# Altium PCB dual-motor-driver.PcbDoc
Units mil, origin at the board's own origin, x right, y up, seen from the top; angles counter-clockwise.
Board outline 2940 x 1790 mil, 2 copper layers (Component Side, Bottom Layer), stack 12.8 mil thick; 58 components, 38 nets, 164 pads, 475 vias.
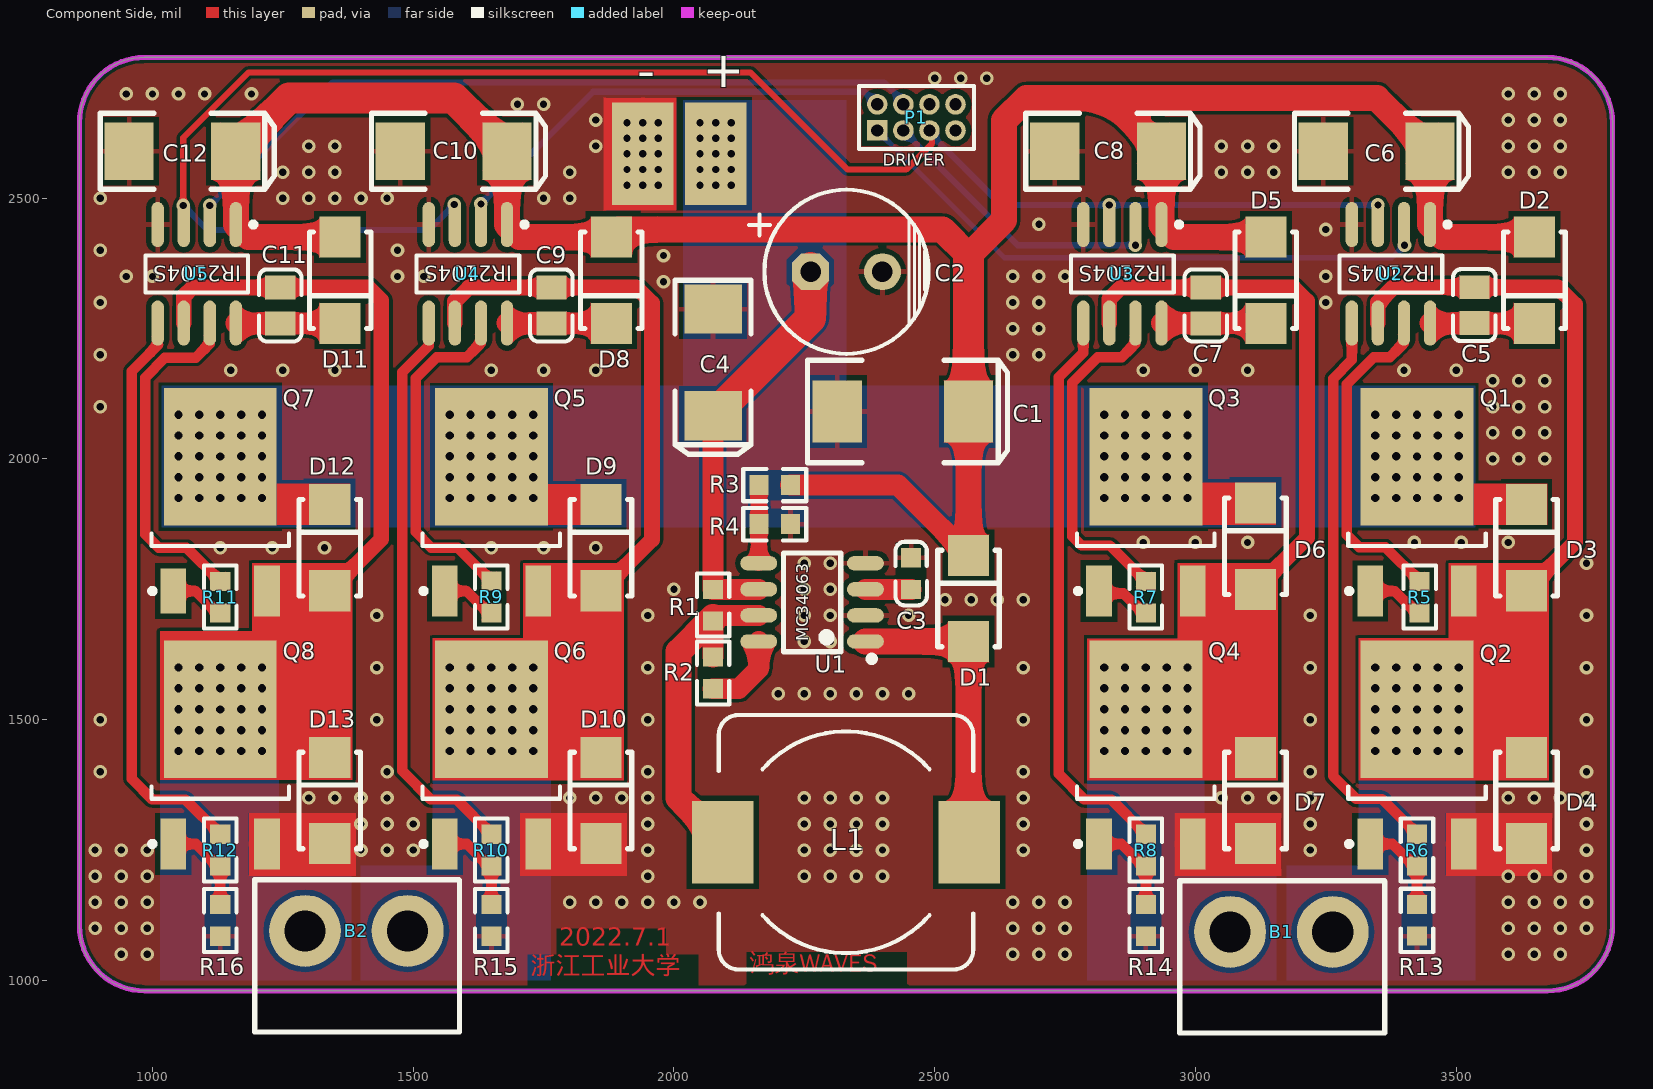
[diagram p0: Component Side view]
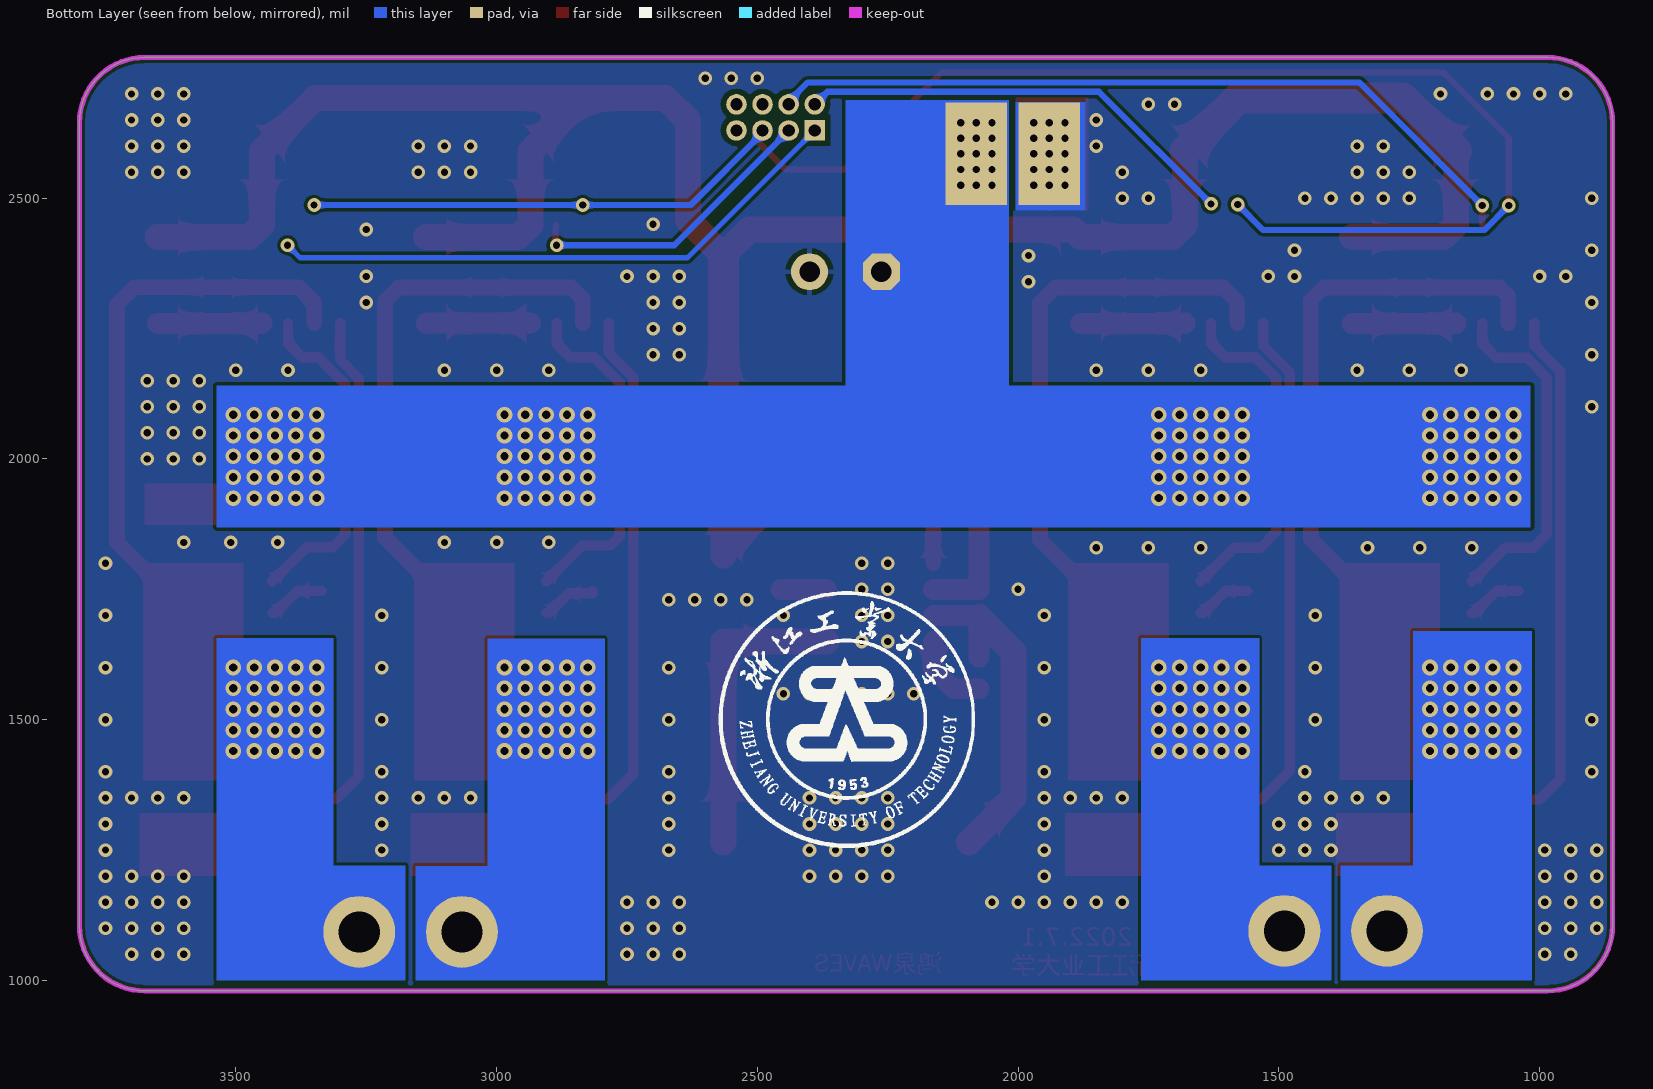
[diagram p1: Bottom Layer view, seen from below]
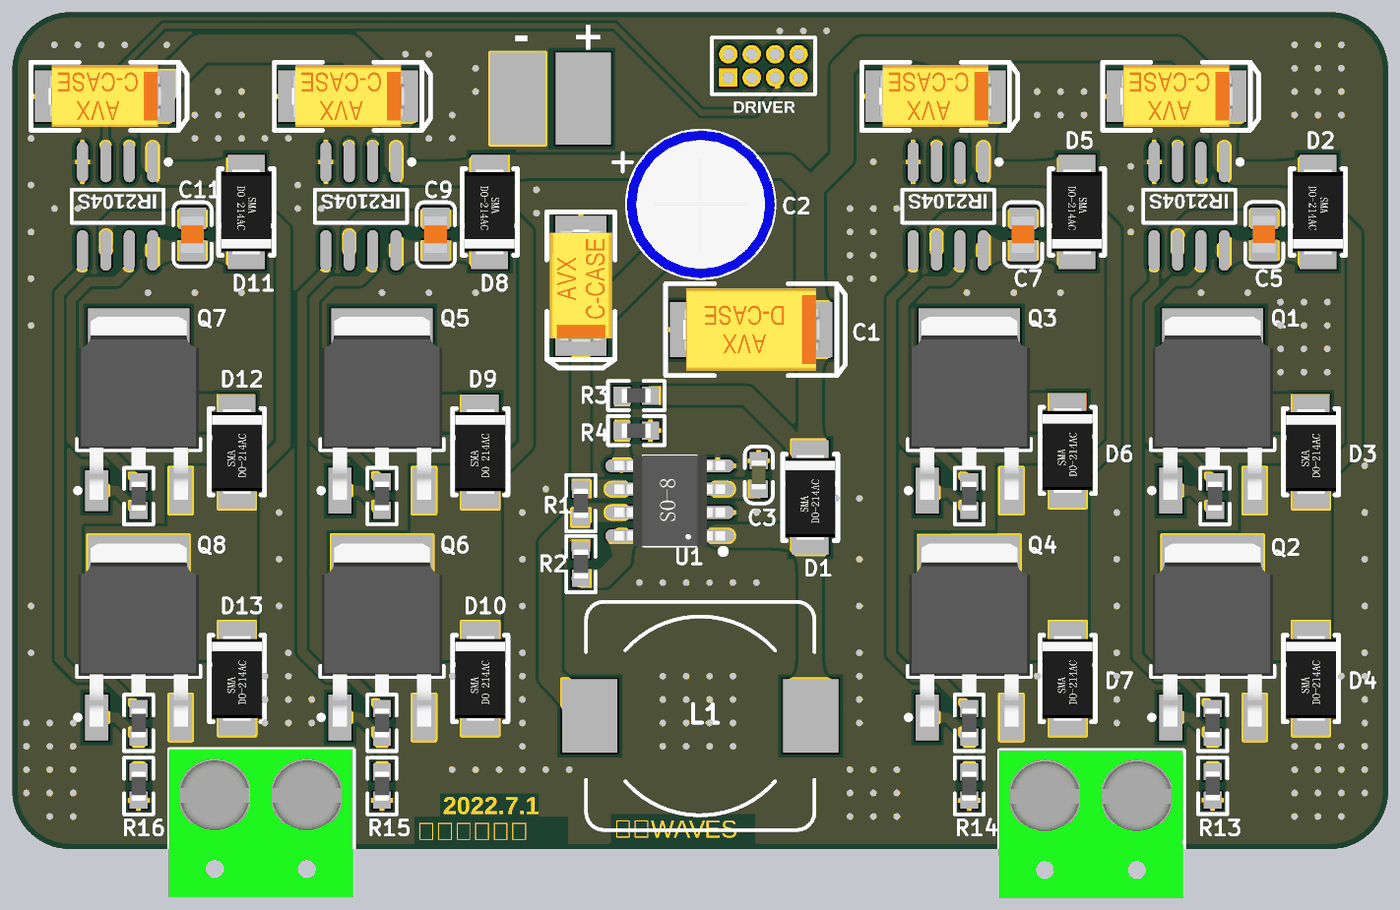
[diagram p2: 3D render of the assembled board from above, using the file's embedded part models]

## Layer stack, top to bottom
Top Solder: solder mask 0.4, Solder Resist, Dk 3.5
Component Side: signal copper 1.4
Dielectric 1: core 10, FR-4, Dk 4.2
Bottom Layer: signal copper 1.4
Solder Side: solder mask 0.4, Solder Resist, Dk 3.5

## Board outline
860,1105 860,2645 cw(c985,2645) 985,2770 3675,2770 cw(c3675,2645) 3800,2645 3800,1105 cw(c3675,1105) 3675,980 985,980 cw(c985,1105)

## Design rules (kind name [scope] priority, off if disabled: settings)
Clearance [All] p1: gap=6 ignorepadtopadclearanceinfootprint=FALSE except(0: Arc-Hole Track-Hole SMDPad-Hole THPad-Hole Via-Hole Fill-Hole Poly-Hole Region-Hole Text-Hole; 10: Arc-SMDPad Arc-THPad Arc-Fill Track-SMDPad Track-THPad Track-Fill SMDPad-SMDPad SMDPad-THPad SMDPad-Via SMDPad-Fill SMDPad-Poly SMDPad-Region SMDPad-Text THPad-THPad THPad-Via THPad-Fill THPad-Poly THPad-Region THPad-Text Via-Fill Fill-Fill)
HoleSize [All] p1: absolutevalues=TRUE maxlimit=240 minlimit=1 maxpercent=80.000 minpercent=20.000
MinimumSolderMaskSliver [All] p1: minsoldermaskwidth=0
PolygonConnect PolygonConnect_GND [ISVIA] p1: connectstyle=Direct reliefconductorwidth=10 reliefentries=4 polygonreliefangle="90 Angle" airgapwidth=10
PolygonConnect [All] p2: connectstyle=Relief reliefconductorwidth=10 reliefentries=4 polygonreliefangle="90 Angle" airgapwidth=10
RoutingVias [All] p1: holewidth=18 width=30 viastyle="Through Hole" minholewidth=12 minwidth=22 maxholewidth=24 maxwidth=40
SilkToSilkClearance [All] p1: silktosilkclearance=0
SilkToSolderMaskClearance [IsPad] p1: minsilkscreentomaskgap=0 clearancetoexposedcopper=TRUE
SolderMaskExpansion [All] p1: expansion=4
UnpouredPolygon [All] p1: allowunpoured=TRUE allowshelved=TRUE
Width [All] p1: maxlimit=500 minlimit=6 preferedwidth=10
25 further rules are at their usual default settings.

## Components (designator, comment, footprint, x,y, rotation, side; value= is the part's Value field where it differs from the comment)
B1 "Motor" "Con 2接线端子" 3165,1093 r180 top
B2 "Motor" "Con 2接线端子" 1391,1095 r180 top
C1 "Cap-Pol" LC-CASE-D_7343 2439,2091 r0 top
C2 "Cap-Pol-ES" C-RB-3.5/8 2331,2359 r0 top
C3 "Cap" LC-0603_C 2455,1780.32 r270 top
C4 "Cap-Pol" LC-CASE-C_6032 2075,2185 r270 top
C5 "Cap" LC-0805_C 3535,2295 r90 top
C6 "Cap-Pol" LC-CASE-C_6032 3347.64,2590 r0 top
C7 "Cap" LC-0805_C 3020,2294.45 r90 top
C8 "Cap-Pol" LC-CASE-C_6032 2832.64,2590 r0 top
C9 "Cap" LC-0805_C 1765,2294.45 r90 top
C10 "Cap-Pol" LC-CASE-C_6032 1577.64,2590 r0 top
C11 "Cap" LC-0805_C 1245,2294.45 r90 top
C12 "Cap-Pol" LC-CASE-C_6032 1057.64,2590 r0 top
D1 "1N5819" LC-SMA(DO-214AC)_S1 2565,1732.32 r270 top
D2 "1N5819" LC-SMA(DO-214AC)_S1 3650,2342.68 r90 top
D3 "1N5819" LC-SMA(DO-214AC)_S1 3635,1830 r270 top
D4 "1N5819" LC-SMA(DO-214AC)_S1 3635,1345 r270 top
D5 "1N5819" LC-SMA(DO-214AC)_S1 3135,2342.68 r90 top
D6 "1N5819" LC-SMA(DO-214AC)_S1 3115,1832.68 r270 top
D7 "1N5819" LC-SMA(DO-214AC)_S1 3115,1345 r270 top
D8 "1N5819" LC-SMA(DO-214AC)_S1 1880,2342.68 r90 top
D9 "1N5819" LC-SMA(DO-214AC)_S1 1860,1830 r270 top
D10 "1N5819" LC-SMA(DO-214AC)_S1 1860,1345 r270 top
D11 "1N5819" LC-SMA(DO-214AC)_S1 1360,2342.68 r90 top
D12 "1N5819" LC-SMA(DO-214AC)_S1 1340,1830 r270 top
D13 "1N5819" LC-SMA(DO-214AC)_S1 1340,1345 r270 top
L1 "Inductor Iron" L-SMD-12 2330,1265 r0 top
P1 "DRIVER" MHDR2X4 2390,2630 r0 top
Q1 "IRLR7843" TO-252AA_M#1 3425,1920 r90 top
Q2 "IRLR7843" TO-252AA_M#1 3425,1435 r90 top
Q3 "IRLR7843" TO-252AA_M#1 2905,1920 r90 top
Q4 "IRLR7843" TO-252AA_M#1 2905,1435 r90 top
Q5 "IRLR7843" TO-252AA_M#1 1650,1920 r90 top
Q6 "IRLR7843" TO-252AA_M#1 1650,1435 r90 top
Q7 "IRLR7843" TO-252AA_M#2 1130,1920 r90 top
Q8 "IRLR7843" TO-252AA_M#1 1130,1435 r90 top
R1 "Res1" LC-0603_R 2075,1719.68 r90 top
R2 "Res1" LC-0603_R 2075,1589.68 r90 top
R3 "Res1" LC-0603_R 2193.32,1950 r180 top
R4 "Res1" LC-0603_R 2193.32,1875 r180 top
R5 "Res1" LC-0603_R 3430,1735 r90 top
R6 "Res1" LC-0603_R 3425,1250 r90 top
R7 "Res1" LC-0603_R 2905,1735 r90 top
R8 "Res1" LC-0603_R 2905,1250 r90 top
R9 "Res1" LC-0603_R 1650,1735.31 r90 top
R10 "Res1" LC-0603_R 1650,1250 r90 top
R11 "Res1" LC-0603_R 1130,1735 r90 top
R12 "Res1" LC-0603_R 1130,1250 r90 top
R13 "Res1" LC-0603_R 3425,1115.32 r270 top
R14 "Res1" LC-0603_R 2905,1115 r270 top
R15 "Res1" LC-0603_R 1650,1115 r270 top
R16 "Res1" LC-0603_R 1130,1115 r270 top
U1 "MC34063" LC-SOIC-8_150mil 2265,1725 r90 top
U2 "IR2104S" SO-8_N 3375,2355 r270 top
U3 "IR2104S" SO-8_N 2860,2355 r270 top
U4 "IR2104S" SO-8_N 1605,2355 r270 top
U5 "IR2104S" SO-8_N 1085,2355 r270 top

## Footprints (in the part's own frame and the unit in brackets; to place one, negate y for a bottom-side part, rotate by r counter-clockwise, add the part's x,y. Pads: shape width x height; smd on the part's side, far side on the other; paste and mask are expansions set on the pad)
C-RB-3.5/8 [mm] "插件电解电容"
  oct 1.8x1.8 hole 1: 1(-1.75,0)
  round 1.8 hole 1: 2(1.75,0)
  silkscreen extent -4.74,-4 4,4, body extent -4.03,-4.03 4.03,4.03, height 12.03
"Con 2接线端子" [mm]
  round 3.5 hole 2: 1(-2.5,0) 2(2.5,0)
  silkscreen extent -5.03,-2.49 4.95,4.93, body extent -5,-2.5 5,5.5, height 1.5
L-SMD-12 [mm] "贴片电感12*12"
  rect 3x4 smd: 1(-6,0) 2(6,0)
  silkscreen extent -6.2,-6.2 6.2,6.2, body extent -6.2,-6.22 6.2,6.17, height 2.5
LC-0603_C [mm]
  rect 0.93x0.98 smd: 1(-0.77,0) 2(0.77,0)
  silkscreen extent -1.55,-0.76 1.55,0.76, body extent -0.8,-0.4 0.8,0.4, height 0.6
LC-0603_R [mm]
  rect 0.93x0.98 smd: 1(-0.77,0) 2(0.77,0)
  silkscreen extent -1.53,-0.79 1.54,0.79, body extent -0.8,-0.4 0.8,0.4, height 0.38
LC-0805_C [mm]
  rect 1.16x1.47 smd: 1(-0.875,0) 2(0.875,0)
  silkscreen extent -1.76,-1.04 1.76,1.04, body extent -1,-0.62 1,0.64, height 0.8
LC-CASE-C_6032 [mm]
  rect 2.4x2.8 smd: 1(2.6,0) 2(-2.6,0)
  silkscreen extent -4.01,-1.85 4.47,1.85, body extent -3.05,-1.68 3.05,1.67, height 2.7
LC-CASE-D_7343 [mm]
  rect 2.4x3 smd: 1(3.2,0) 2(-3.2,0)
  silkscreen extent -4.65,-2.5 5.1,2.5, body extent -3.7,-2.23 3.7,2.22, height 3.01
LC-SMA(DO-214AC)_S1 [mm]
  rect 2x2 smd: 1(2.1,0) 2(-2.1,0)
  silkscreen extent -2.35,-1.5 2.35,1.5, body extent -2.3,-1.35 2.3,1.35, height 2.4
LC-SOIC-8_150mil [mm]
  oval 0.7x1.8 smd: 1(-1.905,-2.6) 2(-0.635,-2.6) 3(0.635,-2.6) 4(1.905,-2.6) 5(1.905,2.6) 6(0.635,2.6) 7(-0.635,2.6) 8(-1.905,2.6)
  silkscreen extent -2.9,-3.05 2.4,1.4, body extent -2.45,-3 2.45,3, height 1.7
MHDR2X4 [mm] "Connector; Header; 4x2 Position"
  rect 1x1 hole 0.6: 1(0,0)
  round 1 hole 0.6: 2(0,1.27) 3(1.27,0) 4(1.27,1.27) 5(2.54,0) 6(2.54,1.27) 7(3.81,0) 8(3.81,1.27)
  silkscreen extent -0.9,-0.9 4.71,2.17
SO-8_N [mm] "SOIC, 8-Leads, Body 4.9x3.9mm, Pitch 1.27mm, IPC Medium Density"
  oval 2.2x0.6 smd: 1(-2.4,1.905) 2(-2.4,0.635) 3(-2.4,-0.635) 4(-2.4,-1.905) 5(2.4,-1.905) 6(2.4,-0.635) 7(2.4,0.635) 8(2.4,1.905)
  silkscreen extent -2.52,-2.5 0.9,2.88, body extent -1.95,-2.45 1.95,2.45, height 1.75
TO-252AA_M#1 [mm] "D-PAK, 4-Leads, Body 6.1x6.5mm, Pitch 2.28mm, Lead Span 9.8mm, IPC Low Density"
  rect 2.5x1.25 smd: 1(-4.4,2.28) 3(-4.4,-2.28)
  rect 6.7x5.5 smd: 4(2.15,0)
  silkscreen extent -4.52,-3.35 -1.6,3.43, body extent -4.9,-3.27 5.04,3.27, height 2.39
TO-252AA_M#2 [mm] "D-PAK, 4-Leads, Body 6.1x6.5mm, Pitch 2.28mm, Lead Span 9.8mm, IPC Low Density"
  rect 2.2x1.25 smd: 1(-4.4,2.28)
  rect 2.5x1.25 smd: 3(-4.4,-2.28)
  rect 6.7x5.5 smd: 4(2.15,0)
  silkscreen extent -4.52,-3.35 -1.6,3.43, body extent -4.9,-3.27 5.04,3.27, height 2.39

## Part data
B1 B2: library part "Motor Servo", "Servo Motor"
C1 C4 C6 C8 C10 C12: library part Cap-Pol-A, "钽电容"
C2: "贴片铝电解电容"
C3 C5 C7 C9 C11: "Capacitor"
D1 D2 D3 D4 D5 D6 D7 D8 D9 D10 D11 D12 D13: library part "D Schottky", "Schottky Diode"
L1: "Magnetic-Core Inductor"
P1: library part "Header 4X2", "电机驱动接口"
Q1 Q2 Q3 Q4 Q5 Q6 Q7 Q8: library part IRLR8503, "HEXFET Power MOSFET"
R1 R2 R3 R4 R5 R6 R7 R8 R9 R10 R11 R12 R13 R14 R15 R16: "Resistor"
U1: library part MC34063ADR, "Buck Inverting Buck-Boost Regulator with 3 to 40 V Input and 1.55 to 40 V Output, 0 to 70 degC, 8-Pin SOIC (D), Green (RoHS & no Sb/Br)"
U2 U3 U4 U5: "High and Low Side Driver"

## Free pads (board coordinates)
  rect 118.11x196.85 smd: 1(2080,2585) 2(1940,2585)
  rect 118.11x196.85 smd far side: 1(2080,2585) 2(1940,2585)

## Via types
v1: diameter 26, hole 14, Component Side to Bottom Layer, tented both sides, 275 vias
v2: diameter 30, hole 16, Component Side to Bottom Layer, tented both sides, 200 vias

## Nets (pads, with @x,y where several pads share a name; then routed paths per layer and width w, separated by ;. In a path a pad name is that pad's centre, name@x,y a point inside that pad or via, vN(x,y) a via of type N, cw(c..) or ccw(c..) an arc to the next point about the centre after c; other vN are vias at no path point)
GND: C1.2 C2.2 C3.1 C4.2 C6.2 C8.2 C10.2 C12.2 D4.1 D7.1 D10.1 D13.1 pad.2 Q2.3 Q4.3 Q6.3 Q8.3 R4.1 R13.2 R14.2 R15.2 R16.2 U1.2 U1.4 U2.4 U3.4 U4.4 U5.4
  other v1: 940,1050 990,1050 2650,1050 2700,1050 2750,1050 3600,1050 3650,1050 3700,1050 890,1100 940,1100 990,1100 2650,1100 2700,1100 2750,1100 3600,1100 3650,1100 3700,1100 3750,1100 890,1150 940,1150 990,1150 1800,1150 1850,1150 1900,1150 1950,1150 2000,1150 2050,1150 2650,1150 2700,1150 2750,1150 3600,1150 3650,1150 3700,1150 3750,1150 890,1200 940,1200 990,1200 1950,1200 2250,1200 2300,1200 2350,1200 2400,1200 3600,1200 3650,1200 3700,1200 3750,1200 890,1250 940,1250 990,1250 1400,1250 1450,1250 1500,1250 1950,1250 2250,1250 2300,1250 2350,1250 2400,1250 2670,1250 3220,1250 3750,1250 1400,1300 1450,1300 1500,1300 1950,1300 2250,1300 2300,1300 2350,1300 2400,1300 2670,1300 3220,1300 3750,1300 1300,1350 1350,1350 1400,1350 1450,1350 1800,1350 1850,1350 1900,1350 1950,1350 2250,1350 2300,1350 2350,1350 2400,1350 2670,1350 3050,1350 3100,1350 3150,1350 3220,1350 3600,1350 3650,1350 3700,1350 3750,1350 900,1400 1450,1400 1950,1400 2670,1400 3220,1400 3750,1400 900,1500 1430,1500 1950,1500 2670,1500 3220,1500 3750,1500 2200,1550 2250,1550 2300,1550 2350,1550 2400,1550 2450,1550 1430,1600 1950,1600 2670,1600 3220,1600 3750,1600 2250,1650 2300,1650 1430,1700 1950,1700 2250,1700 2300,1700 2450,1700 3220,1700 3750,1700 2520,1730 2570,1730 2620,1730 2670,1730 2000,1750 2250,1750 2300,1750 2250,1800 2300,1800 3750,1800 1130,1830 1230,1830 1330,1830 1650,1830 1750,1830 1850,1830 2900,1840 3000,1840 3100,1840 3420,1840 3510,1840 3600,1840 3570,2000 3620,2000 3670,2000 3570,2050 3620,2050 3670,2050 900,2100 3570,2100 3620,2100 3670,2100 3570,2150 3620,2150 3670,2150 1150,2170 1250,2170 1350,2170 1650,2170 1750,2170 1850,2170 2900,2170 3000,2170 3100,2170 3400,2170 3500,2170 900,2200 2650,2200 2700,2200 2650,2250 2700,2250 900,2300 2650,2300 2700,2300 3250,2300 1980,2340 950,2350 1000,2350 1470,2350 1520,2350 2650,2350 2700,2350 2750,2350 3250,2350 1980,2390 900,2400 1470,2400 3250,2440 2700,2450 900,2500 1250,2500 1300,2500 1350,2500 1400,2500 1450,2500 1750,2500 1800,2500 1910,2525 1940,2525 1970,2525 1250,2550 1300,2550 1350,2550 1800,2550 3050,2550 3100,2550 3150,2550 3600,2550 3650,2550 3700,2550 1910,2555 1940,2555 1970,2555 1910,2585 1940,2585 1970,2585 1300,2600 1350,2600 1850,2600 3050,2600 3100,2600 3150,2600 3600,2600 3650,2600 3700,2600 1910,2615 1940,2615 1970,2615 1910,2645 1940,2645 1970,2645 1850,2650 3600,2650 3650,2650 3700,2650 1700,2680 1750,2680 950,2700 1000,2700 1050,2700 1100,2700 1190,2700 3600,2700 3650,2700 3700,2700 2500,2730 2550,2730 2600,2730
MOTOR_EN: P1.5 U2.3 U3.3 U4.3 U5.3 | length 3201
  Component Side w12: v1(1059,2486) 1059,2616 1184,2741 2147,2741 2333,2555 2445,2555 2495,2605 2495,2610
  Bottom Layer w12: v1(1059,2486) 1106,2439 1530,2439 v1(1579,2488) ; P1.5@2487.5,2627.5 2628,2487 v1(2835,2487) v1(3350,2487)
NetB1_1: B1.1 C5.2 D3.1 D4.2 Q1.3 Q2.4 U2.6 | length 1030.8
  Component Side w30: U2.6 3350,2300 3379.45,2329.45 C5.2 3694.65,2329.45 3728,2296.1 3728,1840.32 D3.1
  other v2: 3345,1440 3385,1440 3425,1440 3465,1440 3505,1440 3345,1480 3385,1480 3425,1480 3465,1480 3505,1480 3345,1520 3385,1520 3425,1519.65 3465,1520 3505,1520 3345,1560 3385,1560 3425,1560 3465,1560 3505,1560 3345,1600 3385,1600 3425,1600 3465,1600 3505,1600
NetB1_2: B1.2 C7.2 D6.1 D7.2 Q3.3 Q4.4 U3.6 | length 1039.3
  Component Side w30: U3.6 2835,2307 2856.9,2328.9 C7.2 3188.1,2328.9 3214,2303 3214,1849 D6.1
  other v2: 2825,1440 2865,1440 2905,1440 2945,1440 2985,1440 2825,1480 2865,1480 2905,1480 2945,1480 2985,1480 2825,1520 2865,1520 2905,1519.65 2945,1520 2985,1520 2825,1560 2865,1560 2905,1560 2945,1560 2985,1560 2825,1600 2865,1600 2905,1600 2945,1600 2985,1600
NetB2_1: B2.1 C9.2 D9.1 D10.2 Q5.3 Q6.4 U4.6 | length 1035.3
  Component Side w30: U4.6 1580,2302 1606.9,2328.9 C9.2 1928.1,2328.9 1958,2299 1958,1845.32 D9.1
  other v2: 1570,1440 1610,1440 1650,1440 1690,1440 1730,1440 1570,1480 1610,1480 1650,1480 1690,1480 1730,1480 1570,1520 1610,1520 1650,1519.65 1690,1520 1730,1520 1570,1560 1610,1560 1650,1560 1690,1560 1730,1560 1570,1600 1610,1600 1650,1600 1690,1600 1730,1600
NetB2_2: B2.2 C11.2 D12.1 D13.2 Q7.3 Q8.4 U5.6 | length 1045.5
  Component Side w30: U5.6 1060,2312 1076.9,2328.9 C11.2 1414.1,2328.9 1439,2304 1439,1846.32 D12.1
  other v2: 1050,1440 1090,1440 1130,1440 1170,1440 1210,1440 1050,1480 1090,1480 1130,1480 1170,1480 1210,1480 1050,1520 1090,1520 1130,1519.65 1170,1520 1210,1520 1050,1560 1090,1560 1130,1560 1170,1560 1210,1560 1050,1600 1090,1600 1130,1600 1170,1600 1210,1600
NetC3_2: C3.2 U1.3 | length 87.6
  Component Side w40: U1.3 C3.2
NetC5_1: C5.1 D2.2 U2.8 | length 200.2
  Component Side w40: U2.8 3450.51,2260 D2.2
NetC7_1: C7.1 D5.2 U3.8 | length 200.2
  Component Side w40: U3.8 3134.49,2260.51 D5.2
NetC9_1: C9.1 D8.2 U4.8 | length 200.2
  Component Side w40: U4.8 1680.51,2260 C9.1 D8.2
NetC11_1: C11.1 D11.2 U5.8 | length 200.2
  Component Side w40: U5.8 1160.51,2260 C11.1 D11.2
NetD1_1: D1.1 L1.2 U1.1 | length 582.9
  Component Side w50: U1.1 2564.65,1650 D1.1 2565,1266.22 L1.2
NetL1_1: L1.1 R1.1 R2.2 U1.7 | length 661.8
  Component Side w40: R2.2 R1.1 ; R1.1@2075,1696.69 2075,1700 U1.7
  Component Side w50: R1.1 2075,1696.69 2070.85,1692.54 2009,1630.69 2009,1349.78 L1.1
NetQ1_1: Q1.1 R5.1 | length 112.2
  Component Side w20: Q1.1 3382.66,1746.77 3424.75,1704.69 R5.1
NetQ2_1: Q2.1 R6.1 R13.1 | length 183.4
  Component Side w20: Q2.1 3377.66,1261.77 R6.1@3419.75,1219.69 ; R13.1 3425,1214.43 R6.1@3419.75,1219.69 ; R6.1 R6.1@3419.75,1219.69
NetQ3_1: Q3.1 R7.1 | length 109.8
  Component Side w20: Q3.1 2815.24,1742.32 2862.11,1742.32 2899.75,1704.69 R7.1
NetQ4_1: Q4.1 R8.1 R14.1 | length 183.7
  Component Side w20: Q4.1 2857.66,1261.77 R8.1@2899.75,1219.69 ; R14.1 2905,1214.43 R8.1@2899.75,1219.69 ; R8.1 R8.1@2899.75,1219.69
NetQ5_1: Q5.1 R9.1 | length 107.1
  Component Side w20: Q5.1 1602.98,1746.77 1644.75,1705 R9.1
NetQ6_1: Q6.1 R10.1 R15.1 | length 181.9
  Component Side w20: Q6.1 1602.66,1261.77 R10.1@1644.75,1219.69 ; R10.1@1644.75,1224.69 R10.1@1650,1224.69 ; R15.1 1650,1219.43 1649.75,1219.69 R10.1
NetQ7_1: Q7.1 R11.1 | length 107.2
  Component Side w20: Q7.1 1082.66,1746.77 1124.75,1704.69 R11.1
NetQ8_1: Q8.1 R12.1 R16.1 | length 183.7
  Component Side w20: Q8.1 1082.66,1261.77 R12.1@1124.75,1219.69 ; R16.1 1130,1214.43 R12.1@1124.75,1219.69 ; R12.1 R12.1@1124.75,1219.69
NetR2_1: R2.1 U1.8 | length 155.9
  Component Side w40: R2.1 2124.37,1559.37 2162.64,1597.64 U1.8
NetR3_2: R3.2 R4.2 U1.5 | length 150.2
  Component Side w30: U1.5 2163,1800.36 R4.2 R3.2
NetR5_2: R5.2 U2.7 | length 646.4
  Component Side w20: U2.7 3400,2222 3373,2195 3342,2195 3290,2143 3290,1855 3314,1831 3364.32,1831 R5.2
NetR6_2: R6.2 U2.5 | length 1090.7
  Component Side w20: U2.5 3300,2190 3264,2154 3264,1392 3308,1348 3357.32,1348 R6.2
NetR7_2: R7.2 U3.7 | length 662.6
  Component Side w20: U3.7 2885,2221 2859,2195 2812.77,2195 2764,2146.23 2764,1852 2782,1834 2836.32,1834 R7.2
NetR8_2: R8.2 U3.5 | length 1098.9
  Component Side w20: U3.5 2785,2204 2738,2157 2738,1396 2787,1347 2838.32,1347 R8.2
NetR9_2: R9.2 U4.7 | length 670.5
  Component Side w20: U4.7 1630,2222 1603,2195 1544.77,2195 1505,2155.23 1505,1860 1535,1830 1585.63,1830 R9.2
NetR10_2: R10.2 U4.5 | length 1101
  Component Side w20: U4.5 1530,2217 1479,2166 1479,1402 1534,1347 1583.32,1347 R10.2
NetR11_2: R11.2 U5.7 | length 672
  Component Side w20: U5.7 1110,2221 1083,2194 1024,2194 986,2156 986,1856 1012,1830 1065.32,1830 R11.2
NetR12_2: R12.2 U5.5 | length 1108.4
  Component Side w20: U5.5 1010,2218 960,2168 960,1387 1000,1347 1063.32,1347 R12.2
PWM_IN1: P1.4 U5.2 | length 1474.6
  Component Side w12: U5.2 U5.2@1110,2481
  Bottom Layer w12: v1(1110,2486) 1346,2722 2403,2722 P1.4@2440,2685
PWM_IN2: P1.2 U4.2 | length 859
  Bottom Layer w12: v1(1630,2489) 1845,2704 2366,2704 P1.2
PWM_IN3: P1.1 U2.2 | length 1122
  Bottom Layer w10: P1.1 2634,2386 3377,2386 v1(3401,2410)
PWM_IN4: P1.3 U3.2 | length 577.5
  Component Side w12: v1(2885,2410) 2887,2412 2887,2447.49 U3.2
  Bottom Layer w12: P1.3 2440,2629.53 2659.53,2410 v1(2885,2410)
RGB_DIN: P1.7
V-BAT: C2.1 C4.1 D3.2 D6.2 D9.2 D12.2 pad.1 Q1.4 Q3.4 Q5.4 Q7.4 R1.2 U1.6 | length 782.1
  Component Side w40: C4.1 R1.2 U1.6
  Component Side w60: C4.1 2262.1,2269.74 C2.1 C2.1@2262.1,2367
  other v1: 2050,2525 2080,2525 2110,2525 2050,2555 2080,2555 2110,2555 2050,2585 2080,2585 2110,2585 2050,2615 2080,2615 2110,2615 2050,2645 2080,2645 2110,2645
  other v2: 1050,1925 1090,1925 1130,1925 1170,1925 1210,1925 1570,1925 1610,1925 1650,1925 1690,1925 1730,1925 2825,1925 2865,1925 2905,1925 2945,1925 2985,1925 3345,1925 3385,1925 3425,1925 3465,1925 3505,1925 1050,1965 1090,1965 1130,1965 1170,1965 1210,1965 1570,1965 1610,1965 1650,1965 1690,1965 1730,1965 2825,1965 2865,1965 2905,1965 2945,1965 2985,1965 3345,1965 3385,1965 3425,1965 3465,1965 3505,1965 1050,2005 1090,2005 1130,2004.65 1170,2005 1210,2005 1570,2005 1610,2005 1650,2004.65 1690,2005 1730,2005 2825,2005 2865,2005 2905,2004.65 2945,2005 2985,2005 3345,2005 3385,2005 3425,2004.65 3465,2005 3505,2005 1050,2045 1090,2045 1130,2045 1170,2045 1210,2045 1570,2045 1610,2045 1650,2045 1690,2045 1730,2045 2825,2045 2865,2045 2905,2045 2945,2045 2985,2045 3345,2045 3385,2045 3425,2045 3465,2045 3505,2045 1050,2085 1090,2085 1130,2085 1170,2085 1210,2085 1570,2085 1610,2085 1650,2085 1690,2085 1730,2085 2825,2085 2865,2085 2905,2085 2945,2085 2985,2085 3345,2085 3385,2085 3425,2085 3465,2085 3505,2085
VCC12: C1.1 C6.1 C8.1 C10.1 C12.1 D1.2 D2.1 D5.1 D8.1 D11.1 R3.1 U2.1 U3.1 U4.1 U5.1 | length 4999.1
  Component Side w40: R3.1 2430,1950 D1.2
  Component Side w50: C12.1 U5.1 1184.13,2425.35 D11.1 ; C10.1 U4.1 1704.13,2425.35 D8.1 1894.65,2440 2515,2440 2565,2390 2633,2458 2633,2649 2676,2692 2833,2692 ; D1.2 C1.1 C1.1@2565,2095 ; D5.1 2959.13,2425.35 U3.1 C8.1 2833,2692 ; D2.1 3474.13,2425.35 U2.1 C6.1 3348,2692 2833,2692
  Component Side w60: C12.1 1262,2692 1578,2692 C10.1 ; C1.1@2565,2095 2565,2390
pads on no net: P1.6 P1.8

## Polygon pours and split planes (outlines as drawn)
GND on Component Side "GND_L02_P-001" (solid, remove dead copper, pour order 0): 800,2820 820,2840 3940,2840 3940,920 3860,840 800,840
GND on Bottom Layer "GND_L02_P-001" (solid, remove dead copper, pour order 2): 770,2830 3730,2830 3920,2640 3920,900 840,900 810,930

## Keep-outs
Keep-Out Layer:
  the board outline again, w10

## Other copper
Component Side:
  rectangle net GND: 3480.16,1200 3685,1320.98
  rectangle net GND: 2960.16,1200 3165,1320.98
  rectangle net GND: 1705.16,1200 1910,1320.98
  rectangle net GND: 1185.16,1200 1390,1320.98
  rectangle net V-BAT: 3533,1873 3675,1953
  rectangle net V-BAT: 3013,1873 3155,1955
  rectangle net V-BAT: 1758,1873 1899,1952
  rectangle net V-BAT: 1238,1873 1379,1953
  rectangle net GND: 1865,2476.57 2005,2693.43
  region net NetB1_1: 3313,1384 3678,1384 3678,1800 3486,1800 3486,1656 3313,1656
  region net NetB2_2: 1191,1800 1383,1800 1383,1385 1015,1385 1015,1670 1191,1670
  region net NetB1_2: 2793,1384 3158,1384 3158,1800 2966,1800 2966,1655 2793,1655
  region net NetB2_1: 1538,1384 1904,1384 1904,1800 1711,1800 1711,1656 1538,1656
  text "2022.7.1" at 1780,1055 h60
  text "鸿泉WAVES" at 2145,1005 h60
  text "浙江工业大学" at 1725,1000 h60
Bottom Layer:
  region net V-BAT: 2331,2688 2017,2688 2017,2141 2331,2141
  rectangle net V-BAT: 1017,1869 3537,2141
  rectangle net GND: 1870.94,2476.57 2005,2685
  region net NetB1_1: 3313,1656 3313,1383 3313,1220 3175,1220 3175,1000 3537,1000 3537,1200 3537,1656
  region net NetB1_2: 2793,1655 2793,1201 2793,1000 3155,1000 3155,1219 3017,1219 3017,1384 3017,1655
  region net NetB2_2: 1015,1670 1015,1000 1381,1000 1381,1220 1242,1220 1242,1384 1242,1670
  region net NetB2_1: 1538,1656 1538,1384 1538,1220 1399,1220 1399,1000 1582,1000 1764,1000 1764,1201 1764,1656

## Silkscreen, mask and mechanical layers (free items; w line width, h text height)
Top Overlay:
  text "-" at 1930,2690 h120
  text "+" at 2055,2690 h120
Bottom Overlay:
  drawing of 4671 lines, arcs and shapes, not listed
Top Solder:
  text "2022.7.1" at 1780,1055 h60
  text "鸿泉WAVES" at 2145,1005 h60
  text "浙江工业大学" at 1725,1000 h60
Solder Side:
  rectangle: 2035,2105 2210,2688
  rectangle: 1030,1905 3525,2105
  region: 3325,1620 3525,1620 3525,1010 3180,1010 3180,1175 3325,1175
  region: 2805,1620 3005,1620 3005,1175 3150,1175 3150,1010 2805,1010
  region: 1750,1620 1750,1010 1405,1010 1405,1180 1550,1180 1550,1620
  region: 1030,1620 1230,1620 1230,1180 1375,1180 1375,1010 1030,1010
  text "阮建明 包君泽 朱君昊 汤楷恩" at 2605,1045 h60

## Dimensions
3675,2770 to 3675,980 on Mechanical 15
860,1105 to 3800,1105 on Mechanical 15